# EAGLE board half-moon-earring (EAGLE 9.6.2)
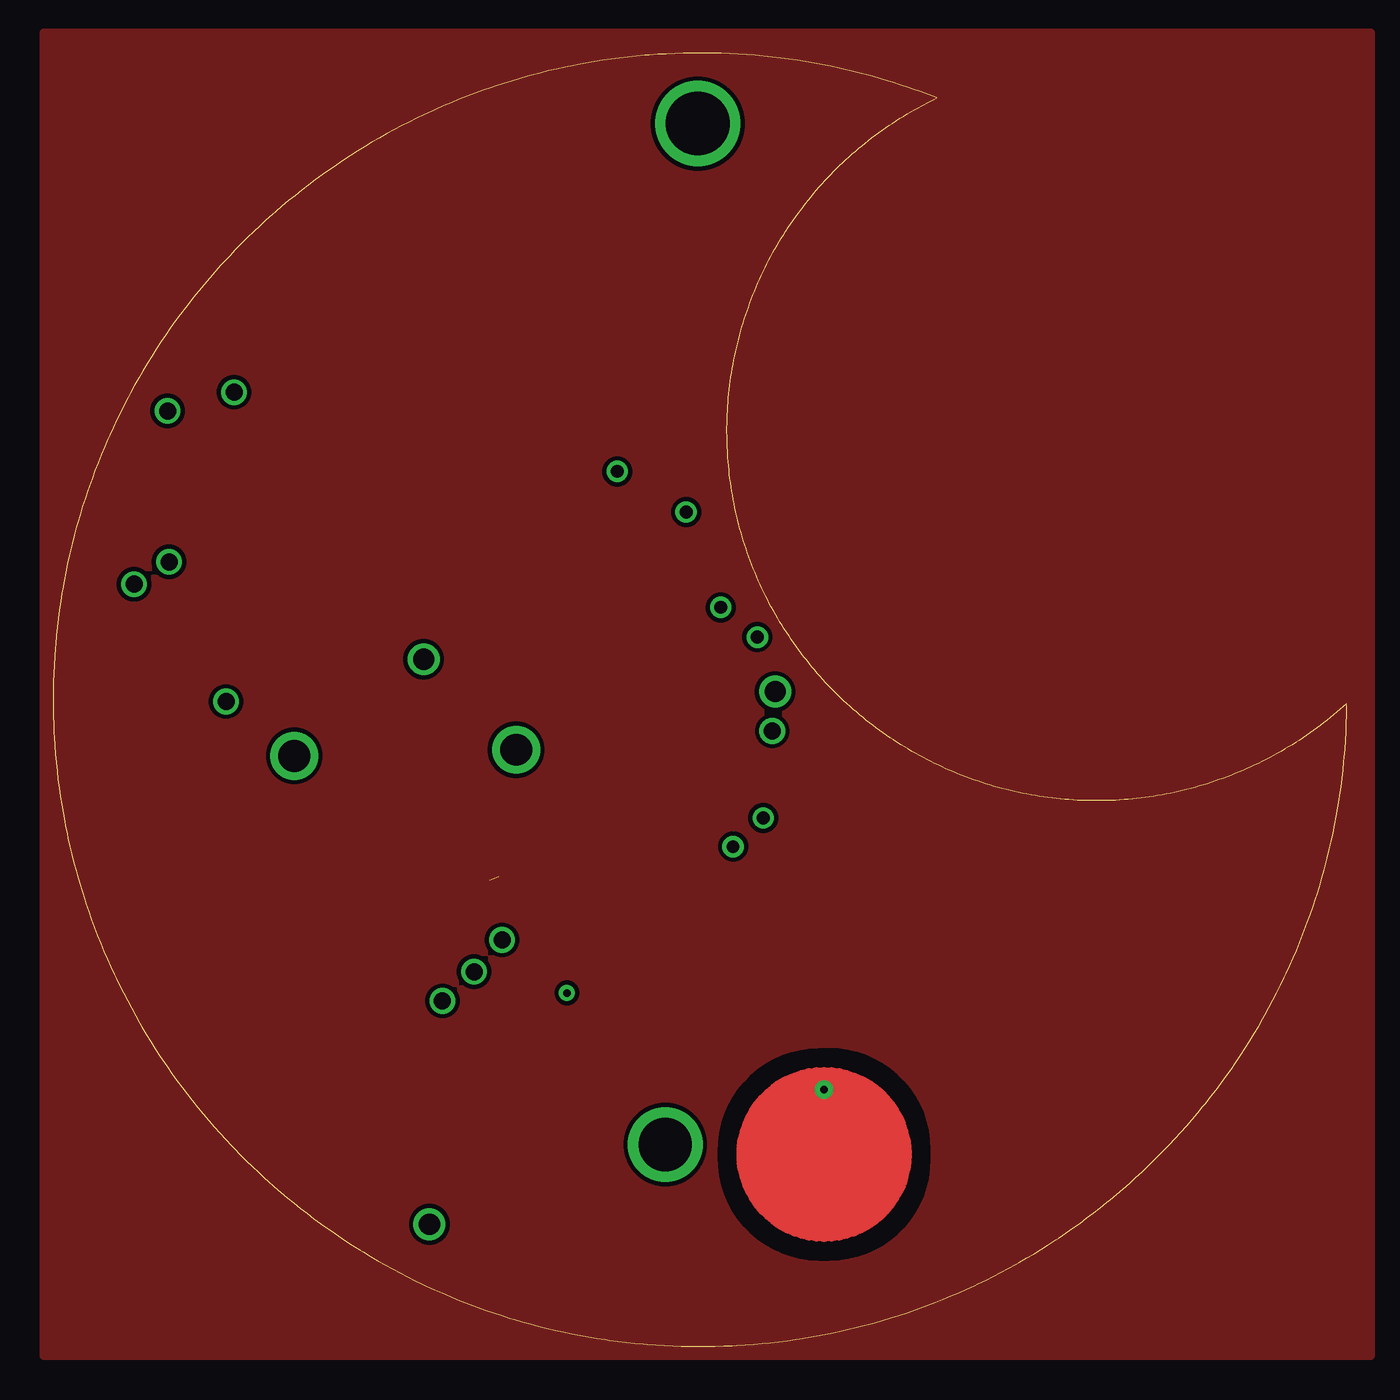
[diagram p0: board, top side]
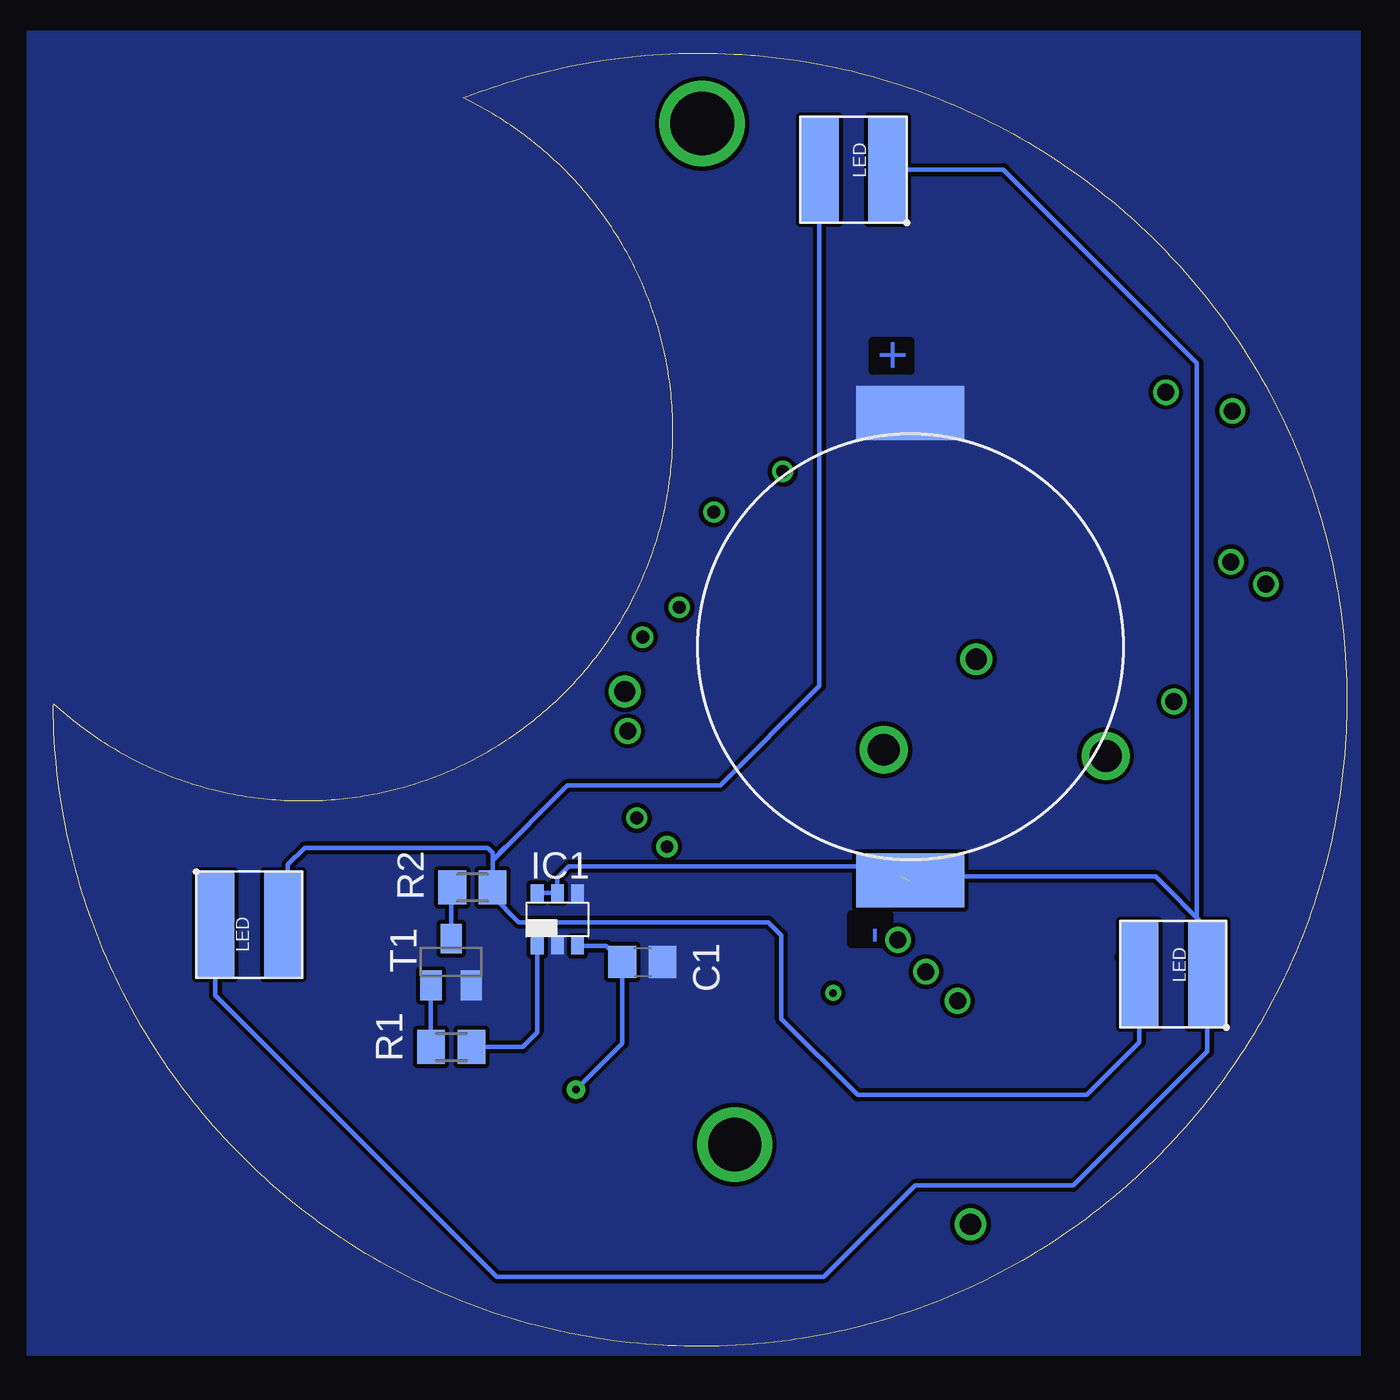
[diagram p1: board, bottom side, seen from below]

Size 60.88 x 60.88 mm. Coordinates in mm from the lower left corner, seen from the top.
Outline: 30.44,60.88 30.04,60.88 29.64,60.87 29.24,60.86 28.84,60.84 28.44,60.81 28.04,60.79 27.84,60.77 27.45,60.73 27.05,60.69 26.65,60.65 26.25,60.59 25.86,60.54 25.46,60.47 25.07,60.41 24.68,60.33 24.48,60.3 24.09,60.22 23.7,60.13 23.31,60.04 22.92,59.94 22.53,59.84 22.34,59.79 21.96,59.68 21.57,59.57 21.19,59.45 20.81,59.32 20.62,59.26 20.24,59.13 19.87,58.99 19.49,58.85 19.12,58.7 18.75,58.55 18.38,58.4 18.02,58.24 17.83,58.15 17.47,57.99 17.11,57.81 16.75,57.64 16.4,57.45 16.04,57.27 15.69,57.07 15.34,56.88 15,56.68 14.66,56.47 14.32,56.26 13.98,56.05 13.64,55.83 13.48,55.72 13.15,55.49 12.82,55.26 12.49,55.03 12.33,54.91 12.01,54.67 11.7,54.43 11.38,54.18 11.07,53.93 10.77,53.67 10.46,53.41 10.31,53.28 10.02,53.01 9.72,52.74 9.43,52.47 9.14,52.19 8.86,51.91 8.58,51.62 8.3,51.33 8.03,51.04 7.89,50.89 7.63,50.59 7.36,50.29 7.11,49.99 6.85,49.68 6.6,49.37 6.48,49.21 6.23,48.9 5.99,48.58 5.75,48.25 5.52,47.93 5.29,47.6 5.07,47.27 4.85,46.93 4.64,46.6 4.43,46.26 4.22,45.91 4.02,45.57 3.82,45.22 3.63,44.87 3.54,44.69 3.35,44.34 3.17,43.98 2.99,43.62 2.82,43.26 2.66,42.9 2.58,42.71 2.42,42.35 2.26,41.98 2.11,41.61 1.97,41.23 1.83,40.86 1.7,40.48 1.63,40.29 1.5,39.92 1.38,39.53 1.26,39.15 1.15,38.77 1.1,38.58 1,38.19 0.9,37.8 0.8,37.41 0.76,37.22 0.67,36.83 0.59,36.44 0.51,36.04 0.44,35.65 0.41,35.45 0.35,35.06 0.29,34.66 0.24,34.27 0.19,33.87 0.15,33.47 0.11,33.07 0.1,32.87 0.07,32.48 0.04,32.08 0.02,31.68 0.01,31.28 0,30.88 0,30.48 0,30.08 0.01,29.68 0.02,29.28 0.04,28.88 0.05,28.68 0.07,28.28 0.11,27.88 0.14,27.48 0.18,27.09 0.23,26.69 0.28,26.29 0.34,25.9 0.4,25.5 0.47,25.11 0.54,24.71 0.58,24.52 0.66,24.13 0.7,23.93 0.78,23.54 0.88,23.15 0.98,22.76 1.08,22.38 1.13,22.18 1.24,21.8 1.36,21.42 1.48,21.04 1.54,20.85 1.67,20.47 1.8,20.09 1.94,19.72 2.09,19.34 2.23,18.97 2.39,18.6 2.55,18.23 2.71,17.87 2.88,17.51 2.96,17.33 3.14,16.97 3.32,16.61 3.5,16.25 3.69,15.9 3.88,15.55 4.08,15.2 4.18,15.03 4.39,14.69 4.6,14.35 4.81,14.01 5.03,13.67 5.25,13.34 5.36,13.18 5.59,12.85 5.83,12.53 6.06,12.2 6.31,11.89 6.55,11.57 6.8,11.26 7.06,10.95 7.31,10.64 7.58,10.34 7.84,10.04 8.11,9.75 8.39,9.46 8.52,9.31 8.8,9.03 9.09,8.74 9.37,8.47 9.66,8.19 9.96,7.92 10.11,7.79 10.41,7.52 10.71,7.26 11.01,7 11.32,6.75 11.64,6.5 11.95,6.25 12.27,6.01 12.59,5.78 12.76,5.66 13.08,5.43 13.41,5.2 13.75,4.98 14.08,4.76 14.42,4.55 14.59,4.45 14.93,4.24 15.28,4.04 15.62,3.84 15.98,3.65 16.33,3.46 16.68,3.28 17.04,3.1 17.4,2.93 17.58,2.84 17.95,2.67 18.31,2.51 18.68,2.35 19.05,2.2 19.42,2.05 19.79,1.91 19.98,1.84 20.36,1.71 20.74,1.58 21.12,1.45 21.5,1.33 21.69,1.28 22.07,1.16 22.46,1.06 22.84,0.95 23.23,0.86 23.62,0.77 24.01,0.68 24.4,0.6 24.8,0.52 25.19,0.45 25.58,0.38 25.98,0.32 26.18,0.3 26.57,0.24 26.97,0.19 27.37,0.15 27.77,0.12 27.97,0.1 28.36,0.07 28.76,0.04 29.16,0.03 29.56,0.01 29.96,0 30.36,0 30.76,0 31.16,0.01 31.56,0.02 31.96,0.04 32.16,0.05 32.56,0.07 32.96,0.1 33.36,0.14 33.75,0.18 34.15,0.22 34.55,0.27 34.94,0.33 35.14,0.36 35.54,0.42 35.93,0.49 36.32,0.57 36.72,0.65 37.11,0.73 37.5,0.82 37.69,0.87 38.08,0.97 38.46,1.07 38.66,1.12 39.04,1.23 39.42,1.35 39.81,1.47 40.19,1.59 40.56,1.72 40.94,1.86 41.31,2 41.5,2.07 41.87,2.22 42.24,2.37 42.61,2.53 42.97,2.69 43.34,2.86 43.52,2.94 43.88,3.12 44.24,3.3 44.59,3.48 44.94,3.67 45.29,3.86 45.47,3.96 45.81,4.16 46.16,4.37 46.5,4.58 46.84,4.79 47.17,5.01 47.34,5.12 47.67,5.34 48,5.57 48.32,5.8 48.64,6.04 48.96,6.28 49.28,6.53 49.59,6.78 49.75,6.9 50.05,7.16 50.36,7.42 50.66,7.68 50.95,7.95 51.25,8.22 51.54,8.5 51.82,8.78 52.11,9.06 52.25,9.2 52.52,9.49 52.8,9.78 53.07,10.08 53.33,10.38 53.59,10.68 53.85,10.98 54.11,11.29 54.23,11.45 54.48,11.76 54.72,12.08 54.96,12.4 55.2,12.72 55.43,13.05 55.65,13.38 55.88,13.71 56.09,14.05 56.31,14.39 56.52,14.73 56.72,15.07 56.92,15.42 57.02,15.59 57.21,15.94 57.4,16.29 57.58,16.65 57.76,17.01 57.94,17.37 58.02,17.55 58.19,17.91 58.35,18.28 58.51,18.64 58.59,18.83 58.74,19.2 58.88,19.57 59.02,19.95 59.16,20.32 59.29,20.7 59.41,21.08 59.47,21.27 59.59,21.65 59.7,22.04 59.81,22.42 59.86,22.61 59.96,23 60.06,23.39 60.15,23.78 60.23,24.17 60.31,24.56 60.39,24.96 60.46,25.35 60.52,25.74 60.55,25.94 60.6,26.34 60.66,26.73 60.7,27.13 60.74,27.53 60.76,27.73 60.79,28.13 60.82,28.53 60.84,28.92 60.86,29.32 60.87,29.72 60.88,30.12 60.85,30.25 60.7,30.11 60.55,29.98 60.4,29.85 60.24,29.72 60.09,29.6 59.93,29.47 59.78,29.35 59.62,29.22 59.46,29.1 59.3,28.99 59.13,28.87 58.97,28.76 58.8,28.64 58.64,28.53 58.47,28.42 58.3,28.32 58.13,28.21 57.96,28.11 57.79,28.01 57.61,27.91 57.44,27.81 57.26,27.72 57.09,27.63 56.91,27.54 56.73,27.45 56.55,27.36 56.37,27.28 56.18,27.19 56,27.11 55.82,27.03 55.63,26.96 55.45,26.88 55.26,26.81 55.07,26.74 54.88,26.68 54.7,26.61 54.51,26.55 54.32,26.49 54.12,26.43 53.93,26.37 53.74,26.32 53.55,26.26 53.35,26.21 53.16,26.17 52.96,26.12 52.77,26.08 52.57,26.04 52.38,26 52.18,25.96 51.98,25.93 51.79,25.89 51.59,25.87 51.39,25.84 51.19,25.81 50.99,25.79 50.8,25.77 50.6,25.75 50.4,25.73 50.2,25.72 50,25.71 49.8,25.7 49.6,25.69 49.4,25.69 49.2,25.69 49,25.69 48.8,25.69 48.6,25.69 48.4,25.7 48.2,25.71 48,25.72 47.8,25.73 47.6,25.75 47.4,25.77 47.2,25.79 47,25.81 46.81,25.84 46.61,25.86 46.41,25.89 46.21,25.93 46.02,25.96 45.82,26 45.62,26.03 45.43,26.08 45.23,26.12 45.04,26.16 44.84,26.21 44.65,26.26 44.46,26.31 44.26,26.37 44.07,26.42 43.88,26.48 43.69,26.54 43.5,26.61 43.31,26.67 43.12,26.74 42.94,26.81 42.75,26.88 42.57,26.96 42.38,27.03 42.2,27.11 42.01,27.19 41.83,27.27 41.65,27.36 41.47,27.45 41.29,27.53 41.11,27.63 40.94,27.72 40.76,27.81 40.59,27.91 40.41,28.01 40.24,28.11 40.07,28.21 39.9,28.32 39.73,28.43 39.56,28.53 39.39,28.65 39.23,28.76 39.07,28.87 38.9,28.99 38.74,29.11 38.58,29.23 38.42,29.35 38.27,29.47 38.11,29.6 37.96,29.73 37.8,29.86 37.65,29.99 37.5,30.12 37.36,30.25 37.21,30.39 37.06,30.53 36.92,30.67 36.78,30.81 36.64,30.95 36.5,31.09 36.36,31.24 36.23,31.39 36.09,31.53 35.96,31.68 35.83,31.84 35.7,31.99 35.58,32.14 35.45,32.3 35.33,32.46 35.21,32.62 35.09,32.78 34.97,32.94 34.85,33.1 34.74,33.27 34.63,33.43 34.52,33.6 34.41,33.77 34.3,33.94 34.2,34.11 34.1,34.28 34,34.45 33.9,34.63 33.8,34.8 33.71,34.98 33.62,35.15 33.53,35.33 33.44,35.51 33.35,35.69 33.27,35.87 33.19,36.06 33.11,36.24 33.03,36.42 32.95,36.61 32.88,36.8 32.81,36.98 32.74,37.17 32.67,37.36 32.61,37.55 32.54,37.74 32.48,37.93 32.43,38.12 32.37,38.31 32.32,38.5 32.27,38.7 32.22,38.89 32.17,39.09 32.13,39.28 32.08,39.48 32.04,39.67 32,39.87 31.97,40.06 31.94,40.26 31.91,40.46 31.88,40.66 31.85,40.85 31.83,41.05 31.8,41.25 31.78,41.45 31.77,41.65 31.75,41.85 31.74,42.05 31.72,42.45 31.71,42.65 31.71,42.85 31.71,43.05 31.71,43.25 31.71,43.45 31.72,43.65 31.73,43.85 31.74,44.05 31.75,44.25 31.76,44.45 31.78,44.65 31.8,44.84 31.82,45.04 31.84,45.24 31.87,45.44 31.9,45.64 31.93,45.84 31.96,46.03 32,46.23 32.03,46.43 32.07,46.62 32.11,46.82 32.16,47.01 32.2,47.21 32.25,47.4 32.3,47.59 32.36,47.79 32.41,47.98 32.47,48.17 32.53,48.36 32.59,48.55 32.66,48.74 32.72,48.93 32.79,49.12 32.86,49.3 32.93,49.49 33.01,49.68 33.08,49.86 33.16,50.04 33.24,50.23 33.33,50.41 33.41,50.59 33.5,50.77 33.59,50.95 33.68,51.13 33.77,51.3 33.87,51.48 33.97,51.65 34.07,51.83 34.17,52 34.27,52.17 34.38,52.34 34.49,52.51 34.59,52.68 34.71,52.84 34.82,53.01 34.93,53.17 35.05,53.33 35.17,53.49 35.29,53.65 35.41,53.81 35.54,53.97 35.66,54.12 35.79,54.28 35.92,54.43 36.05,54.58 36.18,54.73 36.32,54.88 36.46,55.02 36.59,55.17 36.73,55.31 36.87,55.45 37.02,55.59 37.16,55.73 37.31,55.87 37.46,56 37.61,56.13 37.76,56.26 37.91,56.39 38.06,56.52 38.22,56.65 38.37,56.77 38.53,56.89 38.69,57.02 38.85,57.13 39.02,57.25 39.18,57.37 39.34,57.48 39.51,57.59 39.68,57.7 39.85,57.81 40.02,57.91 40.19,58.02 40.36,58.12 40.53,58.22 40.71,58.31 40.88,58.41 41.24,58.59 41.42,58.68 41.57,58.77 41.2,58.91 40.82,59.05 40.45,59.19 40.26,59.25 39.88,59.38 39.5,59.5 39.31,59.56 38.92,59.67 38.54,59.78 38.34,59.83 37.96,59.94 37.57,60.03 37.18,60.12 36.99,60.17 36.59,60.25 36.2,60.33 35.81,60.4 35.42,60.47 35.02,60.53 34.62,60.59 34.23,60.64 33.83,60.69 33.63,60.71 33.23,60.75 33.04,60.77 32.64,60.8 32.24,60.83 31.84,60.85 31.44,60.86 31.24,60.87 30.84,60.88 30.44,60.88
Copper layers (1*16): Top 0.035mm / dielectric 1.5mm / Bottom 0.035mm
Design rules "ELETROBLOCKS RULES *": minimum track width 8mil, minimum drill 0.35mm, track to track 8mil, track to pad 8mil, pad to pad 8mil, via to via 8mil, smd to smd 8mil, copper to edge 0mil, drill to drill 8mil, minimum pad ring 10mil, minimum via ring 8mil, stop-mask expansion 4mil, vias tented up to drill 0mil, thermal gap 0mil

## Footprints (pad centres in the part's own frame; a part is rotated, then mirrored left to right if it is on the bottom)
BUTTON_PASSIVE_8MM = drill 0.356: BUTTON 0,3.048
C0805 = smd 1.3 x 1.5: 1 -0.95,0; 2 0.95,0
TSOT23-6_DDC = smd 0.6 x 0.8: 1 -0.95,-1.25; 2 0,-1.25; 3 0.95,-1.25; 4 0.95,1.25; 5 0,1.25; 6 -0.95,1.25
LED5050 = smd 1.8 x 5: P$1 -1.6,0; P$2 1.6,0
M0805 = smd 1.3 x 1.6: 1 -0.95,0; 2 0.95,0
SOT23-BEC = smd 1 x 1.4: B -0.95,-1.1; C 0,1.1; E 0.95,-1.1
CR2035 = smd 2.54 x 5.08: P$1 -11,0; P$2 11,0

## Placement (x,y rotation side)
B2  [BUTTON_PASSIVE_8MM]  36.28,9.04 0 top
C1  22pf  [C0805]  33.15,18.1 0 bottom
IC1  TTP223  [TSOT23-6_DDC]  37.15,20.1 0 bottom
LED1  LED5050  [LED5050]  51.65,19.85 0 bottom
LED2  LED5050  [LED5050]  23.22,55.4 180 bottom
LED3  LED5050  [LED5050]  8.17,17.52 180 bottom
R1  150R  [M0805]  42.15,14.1 180 bottom
R2  150R  [M0805]  41.15,21.6 0 bottom
T1  BC817  [SOT23-BEC]  42.15,18.1 0 bottom
U$1  CR2035  [CR2035]  20.54,32.94 90 bottom

## Library data of the parts
B2 = PatternAgents-TouchWidgets
C1 = rcl; SPICEPREFIX: C
IC1 = texas; MPN: TPS61070DDCR; OC_FARNELL: 1461062; OC_NEWARK: 64M3125
LED1-LED3 = Eletroblocks Lib
R1 R2 = rcl; SPICEPREFIX: R
T1 = transistor
U$1 = cr2025

## Nets
DRIVER: IC1.1 R1.1
GND: C1.2 IC1.2 IC1.4 T1.E U$1.P$2
LEDS: LED1.P$2 LED2.P$2 LED3.P$2 R2.2
N$2: R1.2 T1.B
N$3: R2.1 T1.C
N$11: B2.BUTTON C1.1 IC1.3
VCC: IC1.5 IC1.6 LED1.P$1 LED2.P$1 LED3.P$1 U$1.P$1

## Tracks (layer width: path | path; a pad name or v marks a point on that pad's centre or on a via)
DRIVER
  Bottom 0.203: IC1.1 38.1,14.79 38.79,14.1 R1.1
GND
  pour Bottom: -0.64,-0.44 62.13,-0.44 62.13,61.94 -0.66,61.94
LEDS
  Bottom 0.203: 40.2,22.91 40.2,23.24 40.43,23.47 49.04,23.47 49.83,22.68 49.83,20.07 LED1.P$2 | 40.2,22.89 R2.2 40.2,21.21 38.96,19.97 27.22,19.97 26.61,19.36 26.61,15.43 23.02,11.84 12.25,11.84 9.77,14.32 LED3.P$2 | 40.2,22.89 40.2,22.91 | 40.2,22.91 39.6,23.51 | 10.5,18.25 10.02,17.77 | LED2.P$2 24.82,31.09 29.5,26.41 36.68,26.41 40.2,22.89
  Bottom 0.305: LED3.P$2 10.02,17.77 10.58,18.33 | R2.2 40.35,22.25 | R2.2 40.2,22.15 | 40.2,22.05 R2.2
N$1  (via drill 3)
  other vias: 30.34,57.57
N$2
  Bottom 0.203: T1.B R1.2
N$3
  Bottom 0.203: R2.1 42.15,21.55 T1.C
  Bottom 0.305: T1.C 42.1,19.25
N$4  (via drill 0.8)
  other vias: 8.52,44.92
N$5  (via drill 0.8)
  other vias: 5.39,44.04
N$6  (via drill 0.8)
  other vias: 5.46,36.93
N$7  (via drill 0.8)
  other vias: 3.81,35.88
N$8  (via drill 0.8)
  other vias: 8.14,30.36
N$9  (via drill 1.5)
  other vias: 11.35,27.8
N$10  (via drill 1)
  other vias: 17.44,32.35
N$11
  Bottom 0.203: IC1.3 34.85,18.85 C1.1 34.1,14.26 B2.BUTTON
N$12  (via drill 1.5)
  other vias: 21.79,28.09
N$13  (via drill 1)
  other vias: 33.98,30.83
N$14  (via drill 0.6)
  other vias: 33.14,33.39
N$15  (via drill 0.6)
  other vias: 31.42,34.79
N$16  (via drill 0.6)
  other vias: 29.79,39.28
N$17  (via drill 0.6)
  other vias: 26.55,41.19
N$18  (via drill 0.8)
  other vias: 33.84,28.97
N$19  (via drill 0.6)
  other vias: 33.42,24.88
N$20  (via drill 0.6)
  other vias: 32,23.53
N$21  (via drill 0.8)
  other vias: 19.81,17.64
N$22  (via drill 0.8)
  other vias: 18.32,16.27
N$23  (via drill 0.8)
  other vias: 21.13,19.14
N$24  (via drill 0.35)
  other vias: 24.18,16.64
N$25  (via drill 2.5)
  other vias: 28.81,9.5
N$26  (via drill 1)
  other vias: 17.71,5.75
SIGNAL
  pour Top: -0.44,-0.44 -0.44,61.85 62,61.85 62,-0.44
VCC  (1 unrouted)
  Bottom 0.203: IC1.6 IC1.5 37.15,22.06 36.62,22.59 21.46,22.59 20.98,22.11 | U$1.P$1 20.54,20.99 | 20.97,22.1 20.98,22.11 | LED2.P$1 16.17,55.4 7.06,46.29 7.06,18.01 LED3.P$1 | LED1.P$1 53.25,16.52 40.01,3.28 24.61,3.28 20.31,7.58 12.88,7.58 6.57,13.89 LED3.P$1 | LED3.P$1 6.57,19.69 8.99,22.11 20.98,22.11
  Bottom 0.305: IC1.5 37.25,21.35 | 38.15,21.3 IC1.6